# EAGLE board SSTuino_Evo (EAGLE 9.6.2)
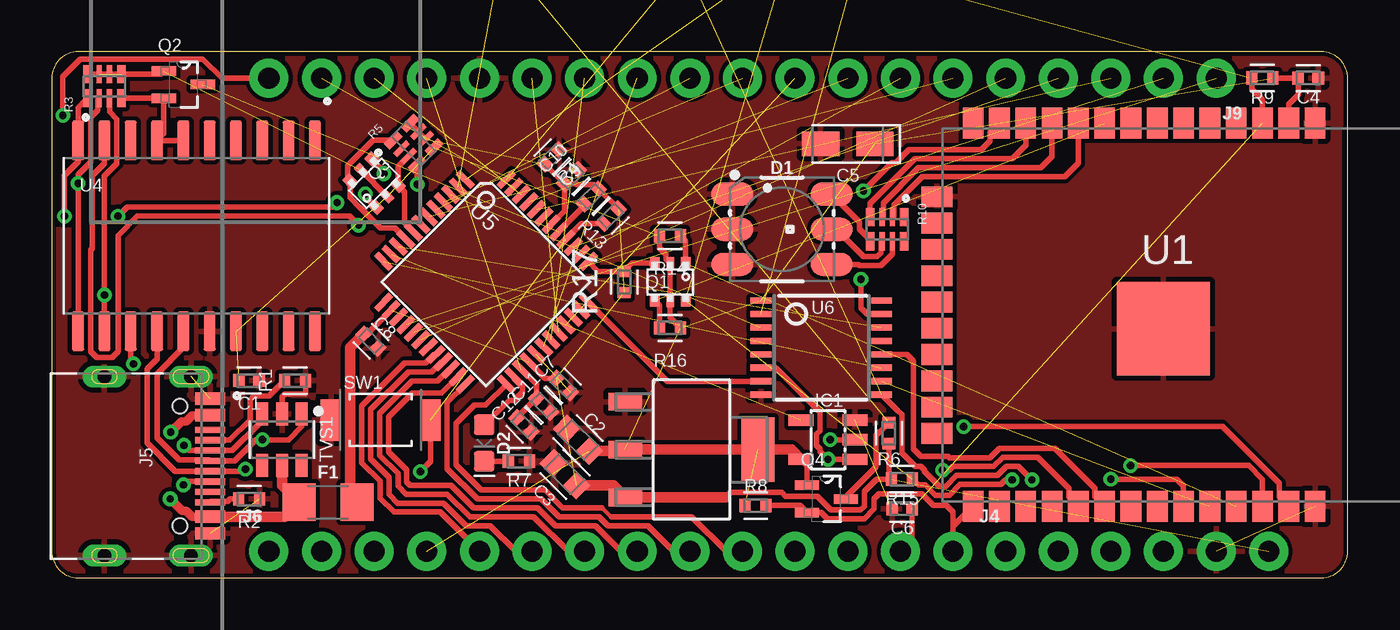
[diagram p0: board, top side]
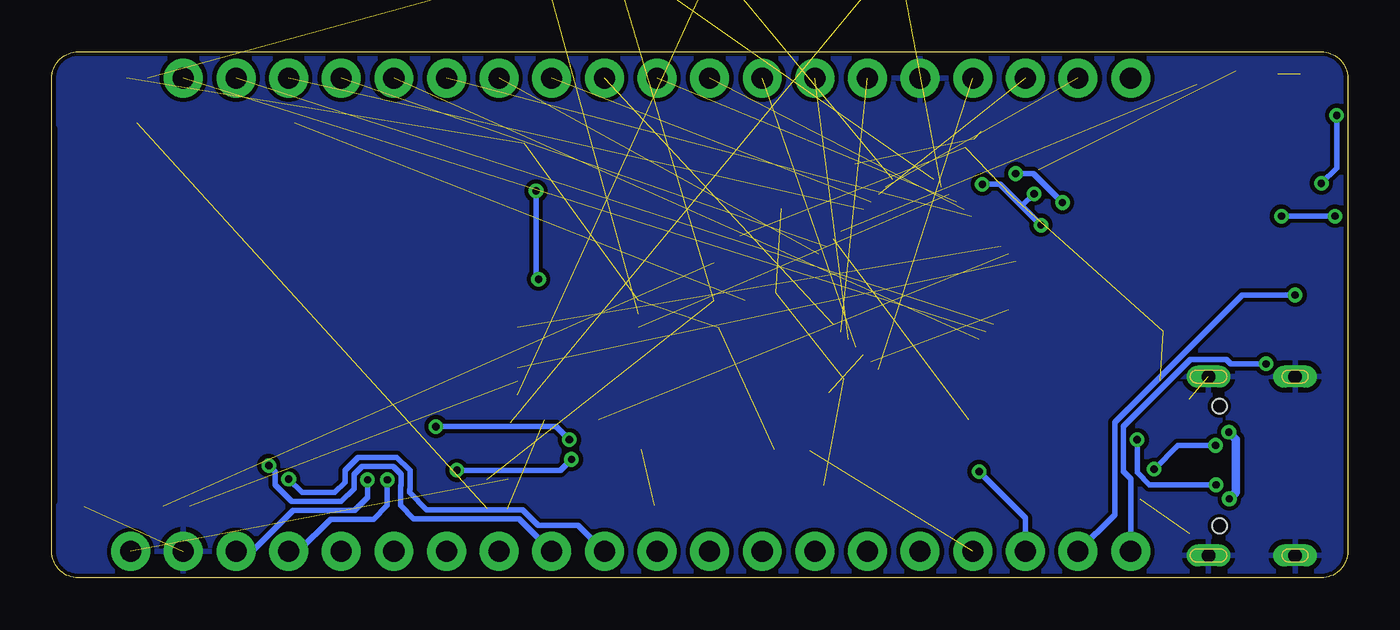
[diagram p1: board, bottom side, seen from below]

Size 62.55 x 25.4 mm. Coordinates in mm from the lower left corner, seen from the top.
Outline: 0,24.13 0,1.27 arc90 1.27,0 61.28,0 arc90 62.55,1.27 62.55,24.13 arc90 61.28,25.4 1.27,25.4 arc90 0,24.13
Copper layers (1*16): Top 0.035mm / dielectric 1.5mm / Bottom 0.035mm
Design rules "SparkFun-2-Layer-General-JLCPCB": minimum track width 7mil, minimum drill 0.3mm, track to track 7mil, track to pad 7mil, pad to pad 7mil, via to via 7mil, smd to smd 7mil, copper to edge 7mil, drill to drill 7mil, minimum pad ring 7mil, minimum via ring 7mil, stop-mask expansion 3mil, vias tented up to drill 25mil, thermal gap 10mil
Net classes: 0 default: width 0.203 mm, drill 0.35 mm; 1 differential: width 0.254 mm

## Footprints (pad centres in the part's own frame; a part is rotated, then mirrored left to right if it is on the bottom)
ARDUINO_R3 = drill 1.016 pad 1.93: 3.3V 2.54,-24.13; 5V 5.08,-24.13; A0 17.78,-24.13; A1 20.32,-24.13; A2 22.86,-24.13; A3 25.4,-24.13; A4 27.94,-24.13; A5 30.48,-24.13; AREF -9.144,24.13; D0 30.48,24.13; D1 27.94,24.13; D2 25.4,24.13; D3 22.86,24.13; D4 20.32,24.13; D5 17.78,24.13; D6 15.24,24.13; D7 12.7,24.13; D8 8.636,24.13; D9 6.096,24.13; D10 3.556,24.13; D11 1.016,24.13; D12 -1.524,24.13; D13 -4.064,24.13; GND@1 7.62,-24.13; GND@2 10.16,-24.13; GND@3 -6.604,24.13; GND@4 33.16,-1.32; IOREF -2.54,-24.13; MISO 30.62,3.76; MOSI 33.16,1.22; NC -5.08,-24.13; RESET@1 0,-24.13; RESET@2 30.62,-1.32; SCK 30.62,1.22; SCL -14.224,24.13; SDA -11.684,24.13; VCC 33.16,3.76; VIN 12.7,-24.13 | hole 3.175: -17.78,24.13; 33.02,8.89; 33.02,-19.05; -19.05,-24.13
CAPC1005X60 = smd 0.56 x 0.629: 1 -0.485,0; 2 0.485,0
CAPC1608X85 = smd 0.921 x 0.97: 1 -0.775,0; 2 0.775,0
CAPMP3216X180N = smd 1.796 x 1.189: 1 -1.31,0; 2 1.31,0
LED-TRICOLOR-5050 = smd 2 x 1.1: 1 2.4,-1.7; 2 2.4,0; 3 2.4,1.7; 4 -2.4,1.7; 5 -2.4,0; 6 -2.4,-1.7
LED-0603 = smd 1 x 1: A -0.877,0; C 0.877,0
1206 = smd 1.6 x 1.8: 1 -1.4,0; 2 1.4,0
SOT23-5L = smd 0.55 x 1.2: 1 -0.95,-1.3; 2 0,-1.3; 3 0.95,-1.3; 4 0.95,1.3; 5 -0.95,1.3
1X06_NO_SILK = drill 1.016 pad 1.88: 1 0,0; 2 2.54,0; 3 5.08,0; 4 7.62,0; 5 10.16,0; 6 12.7,0
HRO_TYPE-C-31-M-12 = smd 0.6 x 1.45: A1B12 -3.25,5.095; A4B9 -2.45,5.095; B1A12 3.25,5.095; B4A9 2.45,5.095 | smd 0.3 x 1.45: A5 -1.25,5.095; A6 -0.25,5.095; A7 0.25,5.095; A8 1.25,5.095; B5 1.75,5.095; B6 0.75,5.095; B7 -0.75,5.095; B8 -1.75,5.095 | drill 0.65 pad 1.05 long: S1 -4.32,4.18; S2 4.32,4.18; S3 -4.32,0; S4 4.32,0 | hole 0.7: -2.89,3.65; 2.89,3.65
1X14_NO_SILK = drill 1.016 pad 1.88: 1 0,0; 2 2.54,0; 3 5.08,0; 4 7.62,0; 5 10.16,0; 6 12.7,0; 7 15.24,0; 8 17.78,0; 9 20.32,0; 10 22.86,0; 11 25.4,0; 12 27.94,0; 13 30.48,0; 14 33.02,0
1X19_NO_SILK = drill 1.016 pad 1.88: 1 0,0; 2 2.54,0; 3 5.08,0; 4 7.62,0; 5 10.16,0; 6 12.7,0; 7 15.24,0; 8 17.78,0; 9 20.32,0; 10 22.86,0; 11 25.4,0; 12 27.94,0; 13 30.48,0; 14 33.02,0; 15 35.56,0; 16 38.1,0; 17 40.64,0; 18 43.18,0; 19 45.72,0
SMT-JUMPER_2_NO_SILK = smd 0.635 x 1.27: 1 -0.406,0; 2 0.406,0
SMT-JUMPER_2_NC_TRACE_SILK = smd 0.635 x 1.27: 1 -0.508,0; 2 0.508,0
ARDUINO-TRANSISTORS_SOT363 = smd 0.5 x 0.6: 1 -0.75,-0.9; 3 0.75,-0.9; 4 0.75,0.9; 6 -0.75,0.9 | smd 0.4 x 0.6: 2 0,-0.9; 5 0,0.9
SOT65P210X110-3N = smd 1.168 x 0.457: 1 -0.94,0.66; 2 -0.94,-0.66; 3 0.94,0
RESC1005X40 = smd 0.535 x 0.644: 1 -0.507,0; 2 0.507,0
RESPACK_4X0402 = smd 0.87 x 0.41: 1 -0.58,0.825; 4 -0.58,-0.825; 5 0.58,-0.825; 8 0.58,0.825 | smd 0.87 x 0.26: 2 -0.58,0.25; 3 -0.58,-0.25; 6 0.58,-0.25; 7 0.58,0.25
SW2-2.6-3.9X2.9X1.5+0.4MM = smd 1 x 2: 1 -2.4,0; 2 2.4,0
SOT95P280X110-6N = smd 1.119 x 0.584: 1 -1.246,0.95; 2 -1.246,0; 3 -1.246,-0.95; 4 1.246,-0.95; 5 1.246,0; 6 1.246,0.95
ESP-32S = smd 1.5 x 1: 1 -9.25,7; 2 -9.25,5.73; 3 -9.25,4.46; 4 -9.25,3.19; 5 -9.25,1.92; 6 -9.25,0.65; 7 -9.25,-0.62; 8 -9.25,-1.89; 9 -9.25,-3.16; 10 -9.25,-4.43; 11 -9.25,-5.7; 12 -9.25,-6.97; 13 -9.25,-8.24; 14 -9.25,-9.51; 25 9.25,-9.51; 26 9.25,-8.24; 27 9.25,-6.97; 28 9.25,-5.7; 29 9.25,-4.43; 30 9.25,-3.16; 31 9.25,-1.89; 32 9.25,-0.62; 33 9.25,0.65; 34 9.25,1.92; 35 9.25,3.19; 36 9.25,4.46; 37 9.25,5.73; 38 9.25,7 | smd 1 x 1.5: 15 -5.7,-11.25; 16 -4.43,-11.25; 17 -3.16,-11.25; 18 -1.89,-11.25; 19 -0.62,-11.25; 20 0.65,-11.25; 21 1.92,-11.25; 22 3.19,-11.25; 23 4.46,-11.25; 24 5.73,-11.25 | smd 4.5 x 4.5: GND 0.68,-0.33
SOT230P696X180-4N = smd 1.6 x 0.838: 1 -3.2,2.311; 2 -3.2,0; 3 -3.2,-2.311 | smd 1.6 x 3.099: 4 3.2,0
SOIC127P1030X265-20N = smd 1.9 x 0.6: 1 -4.605,5.715; 2 -4.605,4.445; 3 -4.605,3.175; 4 -4.605,1.905; 5 -4.605,0.635; 6 -4.605,-0.635; 7 -4.605,-1.905; 8 -4.605,-3.175; 9 -4.605,-4.445; 10 -4.605,-5.715; 11 4.605,-5.715; 12 4.605,-4.445; 13 4.605,-3.175; 14 4.605,-1.905; 15 4.605,-0.635; 16 4.605,0.635; 17 4.605,1.905; 18 4.605,3.175; 19 4.605,4.445; 20 4.605,5.715
TQFP48 = smd 1.016 x 0.305: 1 -4.191,2.794; 2 -4.191,2.286; 3 -4.191,1.778; 4 -4.191,1.27; 5 -4.191,0.762; 6 -4.191,0.254; 7 -4.191,-0.254; 8 -4.191,-0.762; 9 -4.191,-1.27; 10 -4.191,-1.778; 11 -4.191,-2.286; 12 -4.191,-2.794; 25 4.191,-2.794; 26 4.191,-2.286; 27 4.191,-1.778; 28 4.191,-1.27; 29 4.191,-0.762; 30 4.191,-0.254; 31 4.191,0.254; 32 4.191,0.762; 33 4.191,1.27; 34 4.191,1.778; 35 4.191,2.286; 36 4.191,2.794 | smd 0.305 x 1.016: 13 -2.794,-4.191; 14 -2.286,-4.191; 15 -1.778,-4.191; 16 -1.27,-4.191; 17 -0.762,-4.191; 18 -0.254,-4.191; 19 0.254,-4.191; 20 0.762,-4.191; 21 1.27,-4.191; 22 1.778,-4.191; 23 2.286,-4.191; 24 2.794,-4.191; 37 2.794,4.191; 38 2.286,4.191; 39 1.778,4.191; 40 1.27,4.191; 41 0.762,4.191; 42 0.254,4.191; 43 -0.254,4.191; 44 -0.762,4.191; 45 -1.27,4.191; 46 -1.778,4.191; 47 -2.286,4.191; 48 -2.794,4.191
TSSOP16 = smd 0.305 x 0.991: 1 -2.275,-2.918; 2 -1.625,-2.918; 3 -0.975,-2.918; 4 -0.325,-2.918; 5 0.325,-2.918; 6 0.975,-2.918; 7 1.625,-2.918; 8 2.275,-2.918; 9 2.275,2.918; 10 1.625,2.918; 11 0.975,2.918; 12 0.325,2.918; 13 -0.325,2.918; 14 -0.975,2.918; 15 -1.625,2.918; 16 -2.275,2.918

## Placement (x,y rotation side)
B1  ARDUINO_UNO_R3  [ARDUINO_R3]  41.27,11.43 0 top
C1  100n  [CAPC1005X60]  9.53,9.53 0 top
C2  10uF  [CAPC1608X85]  25.4,6.67 135 top
C3  10uF  [CAPC1608X85]  24.77,5 135 top
C4  0.1uF  [CAPC1005X60]  60.64,24.13 0 top
C5  100uF  [CAPMP3216X180N]  38.42,20.95 180 top
C6  1uF  [CAPC1005X60]  41.04,3.33 0 top
C7  0.1uF  [CAPC1005X60]  24.69,9.29 315 top
C8  0.1uF  [CAPC1005X60]  15.4,11.43 315 top
C9  0.1uF  [CAPC1005X60]  24.13,20.32 45 top
C10  4.7uF  [CAPC1005X60]  25.08,19.37 45 top
C11  0.1uF  [CAPC1005X60]  23.73,8.33 315 top
C12  4.7uF  [CAPC1005X60]  22.78,7.38 315 top
D1  [LED-TRICOLOR-5050]  35.24,16.83 180 top
D2  [LED-0603]  20.88,6.51 270 top
F1  6V/0.75A  [1206]  13.34,3.65 0 top
IC1  74AHC1G125  [SOT23-5L]  37.47,6.67 90 top
J4  [1X06_NO_SILK]  46.04,1.27 0 top
J5  TYPE-C-31-M-12  [HRO_TYPE-C-31-M-12]  2.54,5.4 270 top
J6  [1X14_NO_SILK]  10.48,1.27 0 top
J9  [1X19_NO_SILK]  56.2,24.13 180 top
JP1  [SMT-JUMPER_2_NO_SILK]  30.8,29.53 270 bottom  (outside the outline)
JP2  [SMT-JUMPER_2_NO_SILK]  21.59,29.84 90 bottom  (outside the outline)
JP3  JUMPER-SMT_2_NC_TRACE_SILK  [SMT-JUMPER_2_NC_TRACE_SILK]  39.05,29.84 270 bottom  (outside the outline)
JP4  [SMT-JUMPER_2_NO_SILK]  35.24,29.53 270 bottom  (outside the outline)
Q1  BSS138PS  [ARDUINO-TRANSISTORS_SOT363]  29.84,14.29 180 top
Q2  BSS138PW  [SOT65P210X110-3N]  6.35,23.81 0 top
Q3  BSS138PS  [ARDUINO-TRANSISTORS_SOT363]  15.56,19.05 45 top
Q4  BSS138PW  [SOT65P210X110-3N]  37.39,3.81 0 top
R1  5.1k  [RESC1005X40]  11.75,9.53 0 top
R2  5.1k  [RESC1005X40]  9.53,3.81 180 top
R3  4.7k  [RESPACK_4X0402]  2.54,23.73 90 top
R4  4.7k  [RESC1005X40]  26.04,18.41 45 top
R5  4.7k  [RESPACK_4X0402]  17.46,20.95 45 top
R6  10k  [RESC1005X40]  40.4,6.99 90 top
R7  1k  [RESC1005X40]  22.54,5.64 0 top
R8  10k  [RESC1005X40]  33.97,3.49 180 top
R9  12k  [RESC1005X40]  58.42,24.13 0 top
R10  [RESPACK_4X0402]  40.32,16.83 270 top
R13  100k  [RESC1005X40]  26.99,17.46 45 top
R14  4.7k  [RESC1005X40]  29.84,16.51 180 top
R15  4.7k  [RESC1005X40]  41.04,4.76 180 top
R16  4.7k  [RESC1005X40]  29.84,12.06 180 top
R17  4.7k  [RESC1005X40]  27.62,14.29 90 top
SW1  SKRKAEE020  [SW2-2.6-3.9X2.9X1.5+0.4MM]  15.88,7.62 0 top
TVS1  TPUSBLC6-2SC6  [SOT95P280X110-6N]  11.11,6.67 270 top
U1  ESP-32S  [ESP-32S]  53.98,12.7 270 top
U3  AMS1117-3.3  [SOT230P696X180-4N]  30.88,6.19 0 top
U4  ATSAMD11D14A-SSNT  [SOIC127P1030X265-20N]  6.99,16.51 270 top
U5  MEGA4809  [TQFP48]  20.95,14.29 315 top
U6  [TSSOP16]  37.15,11.11 270 top

## Library data of the parts
B1 = SparkFun-Boards
C1-C12 = Capacitor; CATEGORY: Capacitor
D1 = D3ltav's Custom; PROD_ID: DIO-10298
D2 = SparkFun-LED
F1 = SparkFun-Fuses; LCSC_PART: C99563; PROD_ID: RES-11150
IC1 = adafruit; LCSC_PART: C124295
J4 = SparkFun-Connectors; PROD_ID: CONN-08437
J5 = D3ltav's Custom; AVAILABILITY: No availability data; DESCRIPTION: USB Connectors 24 Receptacle 1 8.94*7.3mm RoHS; LCSC_PART: C165948; MF: HRO Electronics Co., Ltd.; MP: TYPE-C-31-M-12; PACKAGE: Package; PRICE: None
J6 J9 = SparkFun-Connectors
JP1-JP4 = SparkFun-Jumpers
Q1 Q3 = D3ltav's Custom; CODE-ARDUINO: 2323; DATASHEET: https://assets.nexperia.com/documents/data-sheet/BSS138PS.pdf; DISTRIBUTOR-LINK: http://www.digikey.com/product-detail/en/nxp-semiconductors/BSS138PS,115/568-8393-1-ND/2763927; DISTRIBUTOR-PN: 568-8393-1-ND; LCSC_PART: C193381; MANUFACTURER: NXP; MANUFACTURER-PN: BSS138PS,115
Q2 Q4 = D3ltav's Custom; AVAILABILITY: In Stock; DESCRIPTION: N-Channel 60V 320mA (Ta) 260mW (Ta), 830mW (Tc) Surface Mount SC-70; LCSC_PART: C193366; MF: NXP Semiconductors; MP: BSS138PW; PACKAGE: SC-70 NXP Semiconductors; PRICE: None
R1 R2 R4 R6-R9 R13-R17 = Resistor; CATEGORY: Resistor; SUB-CATEGORY: Fixed
R3 R5 = D3ltav's Custom; LCSC_PART: C1980
R10 = D3ltav's Custom
SW1 = D3ltav's Custom; LCSC_PART: C115357; MPN: SKRKAEE020
TVS1 = D3ltav's Custom; LCSC_PART: C558442
U1 = esp32
U3 = D3ltav's Custom; LCSC_PART: C6186; MPN: LM1117MP-3.3; OC_FARNELL: 9778195; OC_NEWARK: 41K3470; PACKAGE: SOT223-3; SUPPLIER: NationalSemiconductor
U4 = D3ltav's Custom; AVAILABILITY: In Stock; DESCRIPTION: ARM® Cortex®-M0+ SAM D11D Microcontroller IC 32-Bit 48MHz 16KB (16K x 8) FLASH 20-SOIC; LCSC_PART: C2053599; MF: Microchip; MP: ATSAMD11D14A-SSNT; PACKAGE: SOIC-20 Microchip; PRICE: None
U5 = microwavemont_ATMEGA4809; LCSC_PART: C189475
U6 = D3ltav's Custom; LCSC_PART: C352825

## Nets
3.3V: C1.1 C2.1 C4.1 C5.1 IC1.5 J6.4 Q1.2 Q1.5 Q2.1 Q3.2 Q3.5 Q4.1 R3.5 R3.6 R3.7 R3.8 R5.5 R8.2 R9.2 R14.2 R16.1 U1.2 U3.2 U3.4 U4.17 U6.1
5V: C3.1 C7.1 C8.1 C9.1 C10.1 F1.2 J4.6 R4.2 R5.6 R5.7 R5.8 R6.1 R13.2 R15.2 R17.1 U3.3 U5.14 U5.28 U5.42
BLU: D1.6 R10.5
CC1: J5.A5 R1.1
CC2: J5.B5 R2.2
D_N [differential]: J5.A7 J5.B7 TVS1.3 U4.14
D_P [differential]: J5.A6 J5.B6 TVS1.1 U4.15
ESP_ACK: Q1.4 R16.2 U1.9
ESP_BLUE: R10.4 U1.12
ESP_CS: IC1.1 U1.29 U6.6
ESP_EN: C6.2 J6.13 JP3.2 R9.1 U1.3
ESP_GREEN: R10.2 U1.10
ESP_IO0: J6.14 Q4.2 R8.1 U1.25
ESP_MISO: IC1.2 U1.37
ESP_MOSI: U1.13 U6.15
ESP_RED: R10.3 U1.11
ESP_RX: U1.34 U6.10
ESP_RX_5V: J4.4 JP1.2 U6.9
ESP_SCK: U1.30 U6.12
ESP_SCL: J6.12 U1.36
ESP_SDA: J6.11 U1.33
ESP_TX: Q1.1 R14.1 U1.35
ESP_TX_5V: J4.3 JP4.2 Q1.6 R15.1
GND: C1.2 C2.2 C3.2 C4.2 C5.2 C6.1 C7.2 C8.2 C9.2 C10.2 C11.2 C12.2 D1.1 D1.2 D1.3 IC1.3 J4.5 J5.A1B12 J5.B1A12 J5.S1 J5.S2 J5.S3 J5.S4 J9.15 R1.2 R2.1 R7.2 SW1.1 TVS1.2 U1.1 U1.15 U1.38 U1.GND U3.1 U4.16 U5.15 U5.29 U5.43 U6.8
GRN: D1.4 R10.7
IO0_5V: JP2.2 Q4.3 R6.2
N$2: D2.C R7.1
N$4: JP3.1 U6.2
PA0_D2: J9.3 U5.44
PA1_D7: J9.8 U5.45
PA2_D20_SDA: J9.17 U5.46
PA3_D21_SCL: J9.18 U5.47
PA4_D24_TX2: JP1.1 U5.48
PA5_D23_RX2: JP4.1 U5.1
PA6_D28: JP2.1 U5.2
PA7_D29: U5.3 U6.3
PB0_D9~: J9.10 U5.4
PB1_D10~: J9.11 U5.5
PB2_D5~: J9.6 U5.6
PB3_D30: U5.7
PB4_D27_TX0: Q3.3 R5.3 U5.8
PB5_D26_RX0: Q3.6 R5.1 U5.9
PC0_MOSI: U5.10 U6.14
PC1_MISO: IC1.4 U5.11
PC2_SCK: U5.12 U6.11
PC3_D22: U5.13
PC4_D1_TX1: J9.2 U5.16
PC5_D0_RX1: J9.1 U5.17
PC6_D4: J9.5 U5.18
PC7_D31: U5.19
PD0_A0: J6.5 U5.20
PD1_A1: J6.6 U5.21
PD2_A2: J6.7 U5.22
PD3_A3: J6.8 U5.23
PD4_A4: J6.9 U5.24
PD5_A5: J6.10 U5.25
PD6_A6: D2.A U5.26
PD7_A7_AREF: C11.1 C12.1 J9.16 U5.27
PE0_D11: J9.12 U5.30
PE1_D12: J9.13 U5.31
PE2_D13: J9.14 U5.32
PE3_D8: J9.9 U5.33
PF0_D37: U5.34
PF1_D38: U5.35
PF2_D35_A12: U5.36 U6.7
PF3_D36_A13: Q1.3 R17.2 U5.37
PF4_D6~: J9.7 U5.38
PF5_D3~: J9.4 U5.39
PF6_RST: J6.3 R13.1 SW1.2 U5.40
RED: D1.5 R10.6
RESETN: J9.19 R3.2 U4.11
RX_D11: Q3.4 R3.1 U4.10
SWCLK: J6.2 R3.3 U4.12
SWDIO: J6.1 U4.13
TX_D11: Q3.1 R5.4 U4.9
UPDI: Q2.2 R3.4 U4.6 U4.7
UPDI_5V: Q2.3 R4.1 U5.41
V_USB: F1.1 J5.A4B9 J5.B4A9 TVS1.5

## Tracks (layer width: path | path; a pad name or v marks a point on that pad's centre or on a via)
3.3V  (13 unrouted)
  Top 0.254: IC1.5 36.45,5.44 Q4.1 | R14.2 29.34,15.91 29.65,15.6 29.65,15.38 Q1.2 Q1.5 29.84,12.58 29.91,12.51 R16.1 | Q3.5 Q3.2 | R3.8 R3.5 5.25,24.31 Q2.1 | R9.2 C4.1 60.17,23.34 59.7,22.88 U1.2
  Top 0.508: IC1.5 35.69,6.19 U3.4 U3.2 27.61,6.12 C2.1
5V  (7 unrouted)
  Top 0.254: 32.51,3.88 32.75,4.12 35.24,4.12 35.42,3.94 36.95,3.94 37.62,3.28 39.04,3.28 39.21,3.46 39.21,4.17 39.8,4.76 R15.2 40.4,4.89 R6.1 | C10.1 24.74,17.71 U5.42 | C9.1 C10.1 | C10.1 25.28,19.02 25.32,18.98 26.18,18.98 R4.2 R13.2 | R5.8 R5.6 | U5.14 15.21,11.77 C8.1 | C7.1 23.82,9.63 U5.28
  Top 0.508: 32.51,3.88 U3.3 27.1,4.45 C3.1 | F1.2 14.41,3.98 14.41,11.12 C8.1
BLU
  Top 0.254: D1.6 38.99,17.18 38.99,16.85 39.5,16.34 R10.5
CC1
  Top 0.254: R1.1 10.49,8.78 9.74,8.78 9.57,8.6 9.57,7.62 8.59,6.65 J5.A5
CC2
  Top 0.254: J5.B5 7.68,3.69 8.49,3.69 8.6,3.81 R2.2
D_N  (via drill 0.35)
  Top 0.254: TVS1.3 10,7.91 10,7.44 8.7,6.15 J5.B7 6.62,6.15 v6.38,6.39 | U4.14 5.08,10.56 4.6,10.08 4.6,6.51 5.96,5.15 J5.A7 9.24,5.15 v9.34,5.24
  Bottom 0.254: v9.34,5.24 8.19,6.39 v6.38,6.39
D_P  (via drill 0.35)
  Top 0.254: TVS1.1 12.06,7.3 11.43,6.67 v10.16,6.67 9.84,6.67 8.81,5.65 J5.A6 7.59,5.69 6.15,5.69 5.08,6.76 5.08,9.84 6.35,11.11 U4.15 | J5.B6 6.51,4.65 v6.35,4.49
  Bottom 0.254: v6.35,4.49 9.57,4.49 10.16,5.08 v10.16,6.67
ESP_ACK  (1 unrouted)
  Top 0.254: Q1.4 29.34,13.14 R16.2
ESP_BLUE
  Top 0.254: U1.12 47.01,20.88 46.35,20.23 41.65,20.23 39.5,18.07 R10.4
ESP_CS  (via drill 0.35)
  Top 0.254: U6.6 34.95,10.14 37.07,8.02 37.07,7.1 36.91,6.94 36.91,6.39 37.07,6.24 37.07,6.11 v37.47,5.71 IC1.1 | U1.29 49.08,3.92 49.08,4.33 47.59,5.82 45.9,5.82 45.45,5.37 43.48,5.37 43.31,5.2 v42.99,5.2
  Bottom 0.254: v42.99,5.2 37.98,5.2 v37.47,5.71
ESP_EN  (2 unrouted)
  Top 0.254: C6.2 41.52,1.83 J6.13 | R9.1 57.91,23.61 58.44,23.08 U1.3
ESP_GREEN
  Top 0.254: R10.2 40.64,17.47 40.64,17.99 42.01,19.37 48.9,19.37 49.55,20.02 U1.10
ESP_IO0
  Top 0.254: R8.1 36.1,3.49 Q4.2 37.13,3.15 37.44,2.85 39.22,2.85 39.69,3.32 39.69,3.81 39.93,4.05 41.99,4.05 42.55,3.49 43.18,3.49 43.5,3.17 J6.14 43.5,2.48 U1.25
ESP_MISO  (via drill 0.35)
  Top 0.254: U1.37 59.24,3.92 59.24,4.55 56.49,7.3 v44.01,7.3 | v37.57,6.67 IC1.2
  Bottom 0.254: v44.01,7.3 38.2,7.3 v37.57,6.67
ESP_MOSI  (via drill 0.35)
  Top 0.254: U1.13 45.27,21.48 45.27,21.07 44.86,20.66 41.36,20.66 40.75,20.06 40.55,20.06 v39.17,18.68 | U6.15 39.33,12.74 39.05,13.02 v39.05,14.42
  Bottom 0.254: v39.17,18.68 39.17,14.54 v39.05,14.42
ESP_RED
  Top 0.254: R10.3 40.14,17.47 40.14,18.1 41.83,19.8 47.74,19.8 48.27,20.34 U1.11
ESP_RX  (1 unrouted)
ESP_RX_5V  (via drill 0.35)  (1 unrouted)
  Top 0.254: U6.9 40.84,8.06 40.85,8.06 41.03,7.89 41.03,6.03 41.67,5.39 41.94,5.39 42.12,5.21 42.12,5.14 42.84,4.42 43.14,4.42 43.66,4.94 45.63,4.94 46.08,5.39 46.65,5.39 v47.31,4.73
  Bottom 0.254: v47.31,4.73 47.31,3.89 47.94,3.26 50.89,3.26 52.88,1.27 J4.4
ESP_SCK
  Top 0.254: U1.30 50.35,3.92 50.35,4.33 48.42,6.25 45.73,6.25 45.27,5.8 43.32,5.8 43.26,5.86 41.95,5.86 41.59,6.22 41.59,10.48 41.28,10.79 U6.12
ESP_SCL  (via drill 0.35)
  Top 0.254: v52.07,5.42 57.76,5.42 58.44,4.75 U1.36
  Bottom 0.254: J6.12 40.01,2.86 45.09,2.86 45.72,3.49 45.72,4.44 45.7,4.46 45.7,5 46.08,5.39 47.58,5.39 47.97,5 47.97,4.3 48.58,3.69 50.97,3.69 51.77,4.49 51.77,5.12 v52.07,5.42
ESP_SDA  (via drill 0.35)
  Top 0.254: v51.12,4.76 54.29,4.76 54.62,4.43 U1.33
  Bottom 0.254: J6.11 37.15,2.54 39.08,2.54 39.83,3.29 44.45,3.29 45.29,4.13 45.29,4.26 45.27,4.28 45.27,5.18 45.9,5.82 47.76,5.82 48.4,5.18 48.4,4.62 48.9,4.12 50.48,4.12 v51.12,4.76
ESP_TX  (1 unrouted)
  Top 0.254: R14.1 30.59,16.27 Q1.1
ESP_TX_5V  (via drill 0.35)  (2 unrouted)
  Top 0.254: v46.35,4.73 46.04,4.73 45.81,4.5 43.84,4.5 43.32,3.99 42.66,3.99 42.17,4.48 41.83,4.48 R15.1
  Bottom 0.254: J4.3 50.66,1.27 49.1,2.83 47.02,2.83 46.35,3.49 v46.35,4.73
GND  (5 unrouted)
  Top 0.254: TVS1.2 11.11,8.73 11.27,8.89 12.22,8.89 12.26,8.92 R1.2
  pour Top (isolate 0.203): 0,25.4 62.23,25.4 62.23,0 0,0
  pour Bottom (isolate 0.203): 0,25.4 62.23,25.4 62.23,0 0,0
GRN
  Top 0.254: D1.4 38.94,15.13 38.99,15.08 40.01,15.08 40.57,15.64 R10.7
IO0_5V  (1 unrouted)
  Top 0.254: 40.4,7.42 R6.2 39.96,7.05 39.95,7.05 39.77,6.87 39.77,5.35 38.33,3.9 Q4.3
N$2
  Top 0.254: R7.1 D2.C
N$4  (1 unrouted)
PA0_D2  (1 unrouted)
PA1_D7  (1 unrouted)
PA2_D20_SDA  (1 unrouted)
PA3_D21_SCL  (1 unrouted)
PA4_D24_TX2  (1 unrouted)
PA5_D23_RX2  (1 unrouted)
PA6_D28  (1 unrouted)
PA7_D29  (1 unrouted)
PB0_D9~  (1 unrouted)
PB1_D10~  (1 unrouted)
PB2_D5~  (1 unrouted)
PB4_D27_TX0
  Top 0.254: R5.3 16.72,19.86 Q3.3 17.04,18.63 17.04,17.12 U5.8
PB5_D26_RX0
  Top 0.254: U5.9 16.56,16.88 15.88,16.88 14.88,17.89 14.86,17.89 14.39,18.36 Q3.6 14.27,19.28 14.27,19.89 15.51,21.13 R5.1
PC0_MOSI  (1 unrouted)
PC1_MISO  (1 unrouted)
PC2_SCK  (1 unrouted)
PC4_D1_TX1  (1 unrouted)
PC5_D0_RX1  (1 unrouted)
PC6_D4  (1 unrouted)
PD0_A0
  Top 0.254: J6.5 18.73,3.17 16.51,3.17 15.84,3.85 15.84,4.68 14.97,5.55 14.97,8.3 17.04,10.37 18.05,10.37 18.46,10.79 U5.20
PD1_A1
  Top 0.254: J6.6 22.4,1.27 21.15,2.52 20,2.52 18.91,3.61 16.69,3.61 16.27,4.02 16.27,4.86 15.4,5.73 15.4,8.12 17.22,9.94 18.33,9.94 18.82,10.43 U5.21
PD2_A2
  Top 0.254: J6.7 24.94,1.27 23.26,2.95 20.18,2.95 19.09,4.04 17.11,4.04 16.7,4.45 16.7,5.04 15.83,5.91 15.83,7.94 17.4,9.51 18.62,9.51 19.18,10.07 U5.22
PD3_A3
  Top 0.254: U5.23 18.82,8.93 17.42,8.93 16.26,7.76 16.26,6.09 17.14,5.21 17.14,4.62 17.29,4.47 19.27,4.47 20.36,3.38 23.44,3.38 24.3,2.52 26.23,2.52 27.48,1.27 J6.8
PD4_A4
  Top 0.254: J6.9 30.02,1.27 28.77,2.52 26.84,2.52 26.41,2.95 24.48,2.95 23.62,3.81 20.54,3.81 19.08,5.27 19.08,8.46 U5.24
PD5_A5
  Top 0.203: 27.02,2.95 26.99,2.95 26.55,3.38
  Top 0.254: U5.25 20.94,8.35 20.42,8.35 19.51,7.44 19.51,5.45 20.72,4.24 23.8,4.24 24.66,3.38 25.16,3.38 26.55,3.38 | J6.10 32.56,1.27 30.88,2.95 27.02,2.95
PD6_A6
  Top 0.254: U5.26 22.3,9.64 22.71,9.22 22.71,8.97 22.32,8.58 22.07,8.58 D2.A
PD7_A7_AREF  (1 unrouted)
  Top 0.254: U5.27 23.39,9.34 C11.1 C12.1
PE0_D11  (1 unrouted)
PE1_D12  (1 unrouted)
PE2_D13  (1 unrouted)
PE3_D8  (1 unrouted)
PF2_D35_A12
  Top 0.254: U6.7 29.71,9.49 U5.36
PF3_D36_A13
  Top 0.254: U5.37 26.37,14.79 R17.2 28.02,15.19 Q1.3
PF4_D6~  (1 unrouted)
PF5_D3~  (1 unrouted)
PF6_RST  (via drill 0.35)  (1 unrouted)
  Top 0.254: U5.40 25.57,17.1 R13.1 | SW1.2 18.27,5.61 v17.79,5.13
  Bottom 0.254: v17.79,5.13 15.56,2.89 J6.3
RED
  Top 0.254: R10.6 40.01,16.18 40.01,15.69 39.83,15.51 39.17,15.51 37.85,16.83 D1.5
RESETN  (via drill 0.35)
  Top 0.254: R3.2 2.23,23.09 2.23,22.59 1.88,22.24 1.88,20.08 1.27,19.48 v1.27,19.05 U4.11 | J9.19 8.22,24.13 7.29,25.05 1.38,25.05 0.53,24.2 v0.53,22.33
  Bottom 0.254: v0.53,22.33 0.53,19.79 v1.27,19.05
RX_D11  (via drill 0.35)
  Top 0.254: R3.1 1.27,22.71 U4.10 1.27,20.09 0.6,19.42 0.6,17.48 v0.61,17.46 | Q3.4 16.02,19.65 v16.02,19.52 | v13.77,18.12 13.54,17.89 3.63,17.89 v3.2,17.46
  Bottom 0.254: v16.02,19.52 15.16,19.52 v13.77,18.12 | v3.2,17.46 v0.61,17.46
SWCLK  (via drill 0.35)
  Top 0.254: U4.12 v2.54,13.65 2.54,19.4 3.15,20 3.15,22.15 2.79,22.5 R3.3
  Bottom 0.254: J6.2 11.25,3.04 11.25,7.5 5.09,13.65 v2.54,13.65
SWDIO  (via drill 0.35)
  Top 0.254: v3.95,10.33 3.81,10.46 U4.13
  Bottom 0.254: J6.1 10.48,4.79 10.82,5.13 10.82,7.32 7.59,10.55 5.85,10.55 5.63,10.33 v3.95,10.33
TX_D11  (via drill 0.35)
  Top 0.254: R5.4 v17.64,19 | U4.9 2.54,20.01 1.96,19.43 1.96,15.91 1.88,15.83 1.88,10.93 2.16,10.65 2.92,10.65 3.2,10.93 3.2,16.53 4.13,17.46 14.37,17.46 v14.8,17.03 | Q3.1 15.13,18.41 v15.13,18.55
  Bottom 0.254: v14.8,17.03 15.72,17.94 | 15.72,17.94 16.78,19 v17.64,19 | v15.13,18.55 15.72,17.96 15.72,17.94
UPDI
  Top 0.254: U4.6 U4.7 5.41,21.45 Q2.2 R3.4
UPDI_5V  (1 unrouted)
  Top 0.254: U5.41 25.68,17.93 R4.1
V_USB  (via drill 0.35)
  Top 0.406: J5.A4B9 6.78,7.85 6.49,7.56 6.26,7.56 v5.74,7.03 | v5.71,3.81 6.29,3.24 6.49,3.24 6.78,2.95 J5.B4A9
  Top 0.508: J5.B4A9 11.23,2.95 F1.1 11.11,4.47 TVS1.5
  Bottom 0.406: v5.74,7.03 5.4,6.69 5.4,4.13 v5.71,3.81